# Altium PCB BeagleBoneBlack_cape_template.PcbDoc
Units mil, origin at the board's own origin, x right, y up, seen from the top; angles counter-clockwise.
Board outline 6000 x 4000 mil, 2 copper layers (Top Layer, Bottom Layer); 2 components, 0 nets, 92 pads, 0 vias.
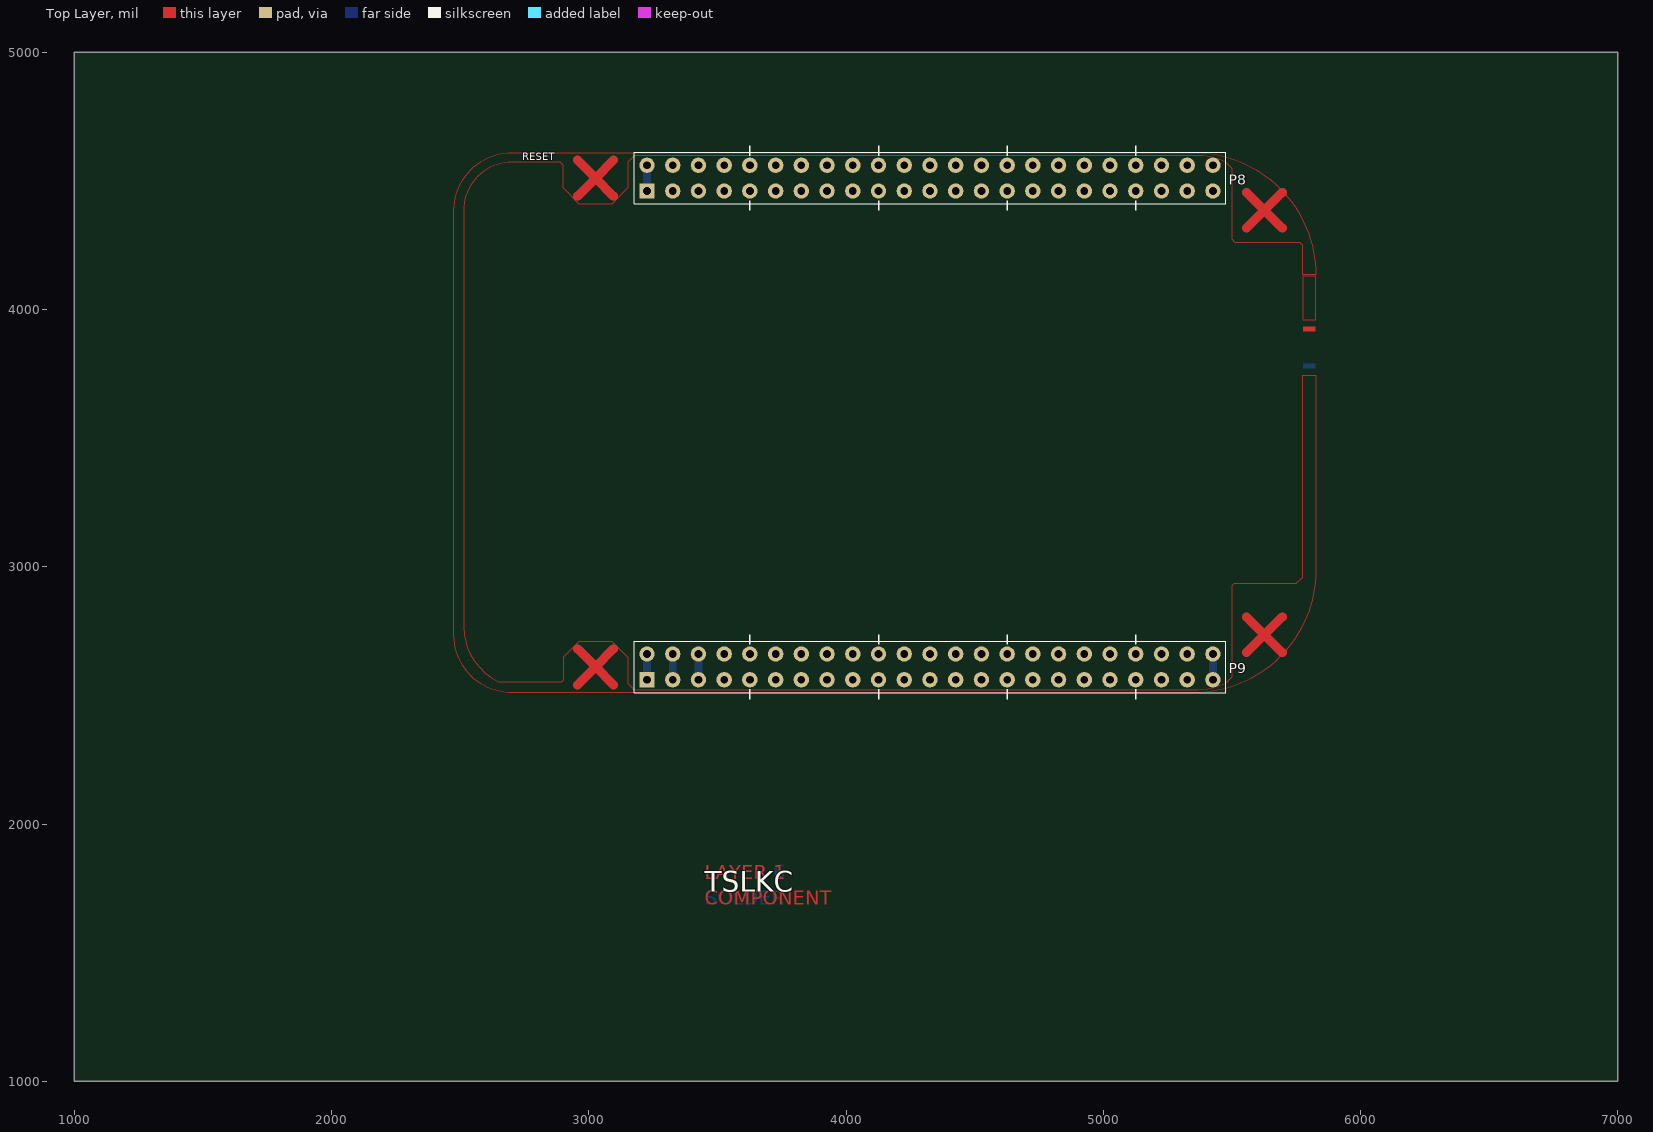
[diagram p0: Top Layer view]
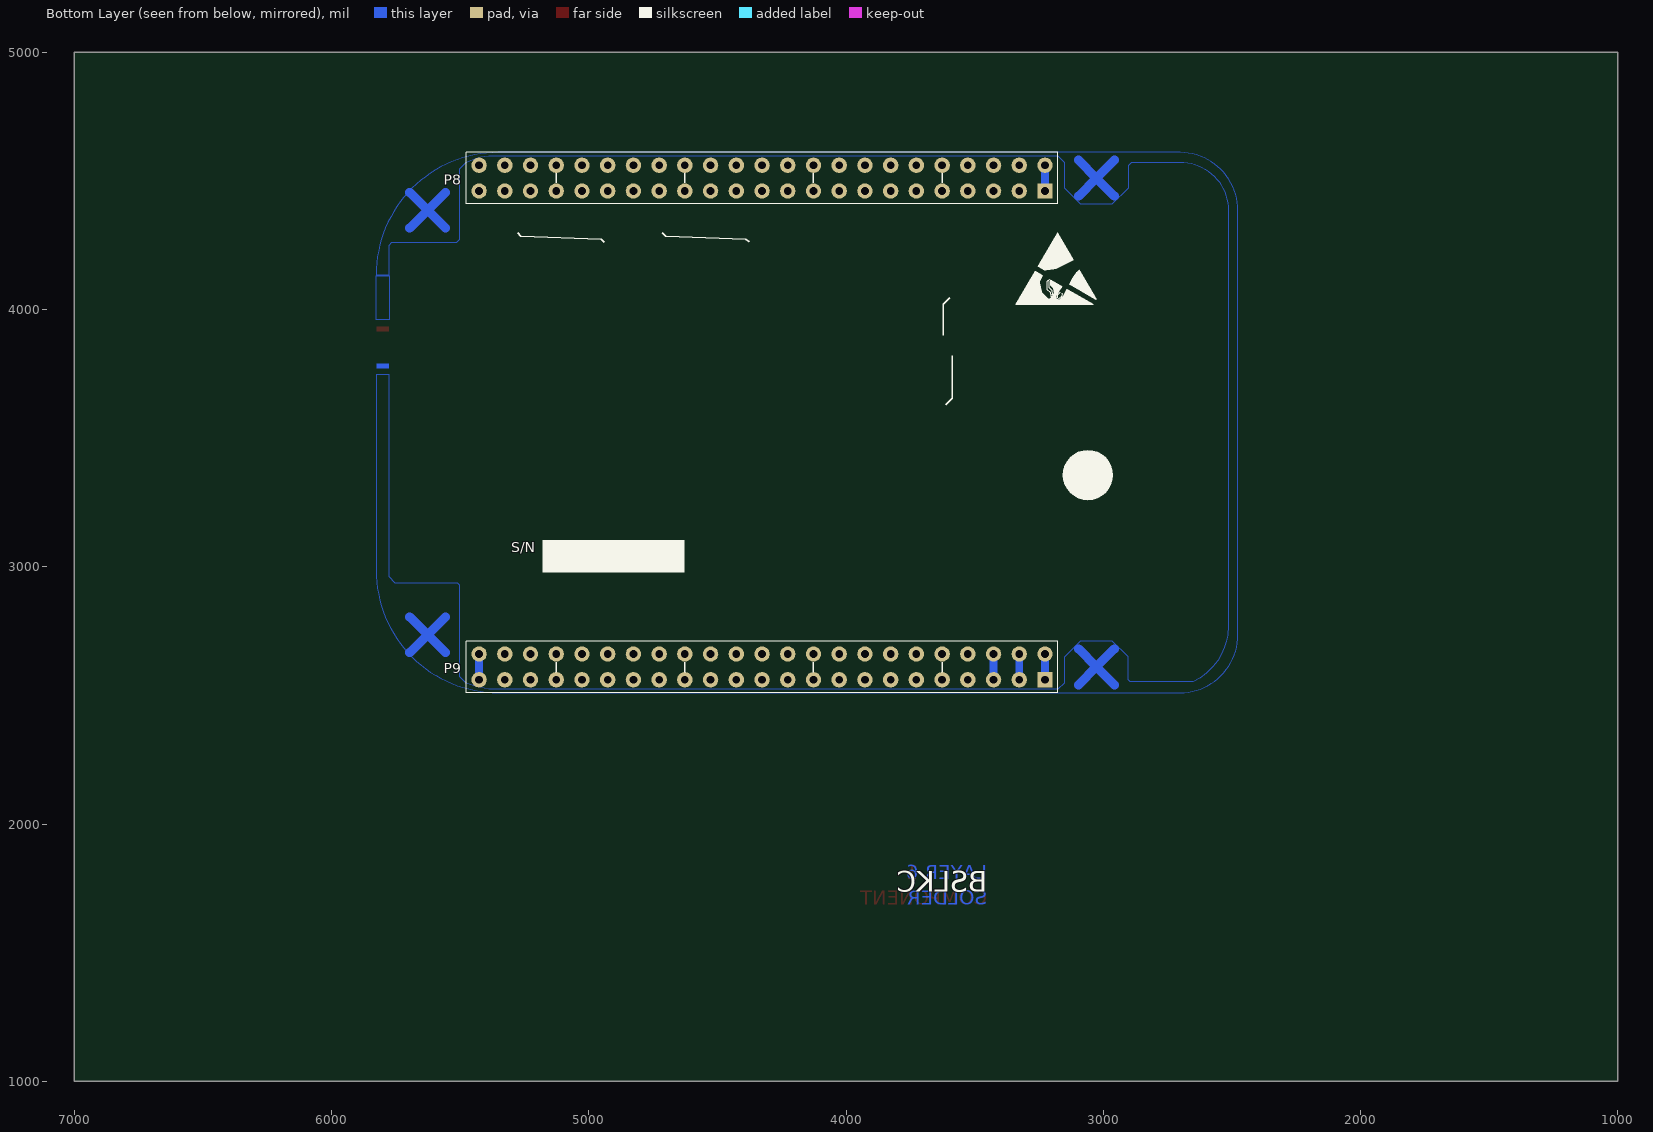
[diagram p1: Bottom Layer view, seen from below]

## Layer stack, top to bottom
Top Layer: signal copper 1.4
Dielectric: dielectric 12.6, FR-4, Dk 4.8
Bottom Layer: signal copper 1.4

## Board outline
1000,1000 7000,1000 7000,5000 1000,5000

## Design rules (kind name [scope] priority, off if disabled: settings)
Clearance [All] p1: gap=10
PolygonConnect [All] p1: connectstyle=Relief reliefconductorwidth=10 reliefentries=4 polygonreliefangle="90 Angle"
RoutingVias [All] p1: holewidth=28 width=50 viastyle="Through Hole" minholewidth=28 minwidth=50 maxholewidth=28 maxwidth=50
SilkscreenOverComponentPads [All] p1: minsilkscreentomaskgap=10
SolderMaskExpansion [All] p1: expansion=4
Width [All] p1: maxlimit=10 minlimit=10 preferedwidth=10
27 further rules are at their usual default settings.

## Components (designator, comment, footprint, x,y, rotation, side; value= is the part's Value field where it differs from the comment)
P8 "FEMALE HEADER 2x23" HEADER23X2 4326.4,4510.8 r0 top locked
P9 "FEMALE HEADER 2x23" HEADER23X2 4326.4,2610.8 r0 top locked

## Footprints (in the part's own frame and the unit in brackets; to place one, negate y for a bottom-side part, rotate by r counter-clockwise, add the part's x,y. Pads: shape width x height; smd on the part's side, far side on the other; paste and mask are expansions set on the pad)
HEADER23X2 [mil] "HEADER23X2"
  rect 60x60 hole 30 mask+2: 1(-1100,-50)
  round 60 hole 30 mask+2: 2(-1100,50) 3(-1000,-50) 4(-1000,50) 5(-900,-50) 6(-900,50) 7(-800,-50) 8(-800,50) 9(-700,-50) 10(-700,50) 11(-600,-50) 12(-600,50) 13(-500,-50) 14(-500,50) 15(-400,-50) 16(-400,50) 17(-300,-50) 18(-300,50) 19(-200,-50) 20(-200,50) 21(-100,-50) 22(-100,50) 23(0,-50) 24(0,50) 25(100,-50) 26(100,50) 27(200,-50) 28(200,50) 29(300,-50) 30(300,50) 31(400,-50) 32(400,50) 33(500,-50) 34(500,50) 35(600,-50) 36(600,50) 37(700,-50) 38(700,50) 39(800,-50) 40(800,50) 41(900,-50) 42(900,50) 43(1000,-50) 44(1000,50) 45(1100,-50) 46(1100,50)
  silkscreen extent -1150,-100 1150,100

## Part data
P8 P9: library part HDR_46_F_2_0.1_0.1, "CONN HEADER FMAL 46PS.1\" DL GOLD"

## Nets (pads, with @x,y where several pads share a name; then routed paths per layer and width w, separated by ;. In a path a pad name is that pad's centre, name@x,y a point inside that pad or via, vN(x,y) a via of type N, cw(c..) or ccw(c..) an arc to the next point about the centre after c; other vN are vias at no path point)
pads on no net: P8.1 P8.2 P8.3 P8.4 P8.5 P8.6 P8.7 P8.8 P8.9 P8.10 P8.11 P8.12 P8.13 P8.14 P8.15 P8.16 P8.17 P8.18 P8.19 P8.20 P8.21 P8.22 P8.23 P8.24 P8.25 P8.26 P8.27 P8.28 P8.29 P8.30 P8.31 P8.32 P8.33 P8.34 P8.35 P8.36 P8.37 P8.38 P8.39 P8.40 P8.41 P8.42 P8.43 P8.44 P8.45 P8.46 P9.1 P9.2 P9.3 P9.4 P9.5 P9.6 P9.7 P9.8 P9.9 P9.10 P9.11 P9.12 P9.13 P9.14 P9.15 P9.16 P9.17 P9.18 P9.19 P9.20 P9.21 P9.22 P9.23 P9.24 P9.25 P9.26 P9.27 P9.28 P9.29 P9.30 P9.31 P9.32 P9.33 P9.34 P9.35 P9.36 P9.37 P9.38 P9.39 P9.40 P9.41 P9.42 P9.43 P9.44 P9.45 P9.46
copper on no net: | length 3647
  Top Layer w35: 2956.86,2541.26 3026.4,2610.8 ; 2956.86,2680.34 3026.4,2610.8 ; 2956.86,4441.26 3026.4,4510.8 ; 2956.86,4580.34 3026.4,4510.8 ; 3095.94,2541.26 3026.4,2610.8 ; 3095.94,2680.34 3026.4,2610.8 ; 3095.94,4441.26 3026.4,4510.8 ; 3095.94,4580.34 3026.4,4510.8 ; 5556.86,2666.26 5626.4,2735.8 ; 5556.86,2805.34 5626.4,2735.8 ; 5556.86,4316.26 5626.4,4385.8 ; 5556.86,4455.34 5626.4,4385.8 ; 5695.94,2666.26 5626.4,2735.8 ; 5695.94,2805.34 5626.4,2735.8 ; 5695.94,4316.26 5626.4,4385.8 ; 5695.94,4455.34 5626.4,4385.8
  Bottom Layer w30: 3226.4,2560.8 3226.4,2660.8 ; 3226.4,4460.8 3226.4,4560.8 ; 3326.4,2560.8 3326.4,2660.8 ; 3426.4,2560.8 3426.4,2660.8 ; 5426.4,2560.8 5426.4,2660.8
  Bottom Layer w35: 2956.86,2541.26 3026.4,2610.8 ; 2956.86,2680.34 3026.4,2610.8 ; 2956.86,4441.26 3026.4,4510.8 ; 2956.86,4580.34 3026.4,4510.8 ; 3095.94,2541.26 3026.4,2610.8 ; 3095.94,2680.34 3026.4,2610.8 ; 3095.94,4441.26 3026.4,4510.8 ; 3095.94,4580.34 3026.4,4510.8 ; 5556.86,2666.26 5626.4,2735.8 ; 5556.86,2805.34 5626.4,2735.8 ; 5556.86,4316.26 5626.4,4385.8 ; 5556.86,4455.34 5626.4,4385.8 ; 5695.94,2666.26 5626.4,2735.8 ; 5695.94,2805.34 5626.4,2735.8 ; 5695.94,4316.26 5626.4,4385.8 ; 5695.94,4455.34 5626.4,4385.8

## Polygon pours and split planes (outlines as drawn)
no net on Bottom Overlay "Bottom Overlay-No Net" (solid): 2999.23,3321.11 2998.58,3321.78 2996.64,3324.17 2994.97,3326.81 2993.61,3329.7 2992.55,3332.84 2991.77,3336.24 2991.33,3339.88 2991.19,3343.74 2991.21,3345.46 2991.46,3349.31 2992.05,3352.86 2992.89,3356.17 2994.03,3359.23 2995.47,3362.04 2997.19,3364.6 2999.23,3366.88 3000.25,3367.85 3002.9,3369.85 3005.76,3371.41 3008.87,3372.52 3012.21,3373.18 3015.82,3373.41 3017.69,3373.35 3020.91,3372.8 3023.94,3371.71 3026.8,3370.13 3029.45,3368.02 3031.89,3365.37 3031.89,3401.58 3041.96,3401.58 3041.96,3315.58 3031.89,3315.58 3031.89,3322.64 3030.89,3321.06 3028.81,3318.72 3026.3,3316.91 3023.41,3315.61 3020.07,3314.83 3016.32,3314.58 3014.24,3314.66 3010.71,3315.11 3007.45,3315.97 3004.45,3317.25 3001.7,3318.97 2999.23,3321.11
no net on Bottom Overlay "Bottom Overlay-No Net" (solid): 3058.86,3358.42 3057.31,3361.09 3056.08,3364.07 3055.21,3367.37 3054.69,3370.99 3054.52,3374.94 3054.52,3376.19 3054.83,3379.95 3055.47,3383.42 3056.47,3386.62 3057.8,3389.54 3059.5,3392.18 3061.56,3394.54 3063.78,3396.52 3066.5,3398.35 3069.42,3399.76 3072.62,3400.76 3076.01,3401.38 3079.66,3401.58 3119.86,3401.58 3119.86,3315.58 3108.29,3315.58 3108.29,3349.28 3079.66,3349.28 3075.82,3349.47 3072.26,3350 3068.98,3350.92 3066.04,3352.17 3063.39,3353.81 3061.06,3355.81 3060.78,3356.09 3058.86,3358.42
no net on Bottom Overlay "Bottom Overlay-No Net" (solid): 3156.31,3356.55 ccw(c3059.67,3356.55) 3059.67,3453.19 ccw(c3059.67,3356.55) 2963.03,3356.55 ccw(c3059.67,3356.55) 3059.67,3259.91 ccw(c3059.67,3356.55) 3156.31,3356.55
no net on Bottom Overlay "Bottom Overlay-No Net" (solid): 4628.9,2978.3 5178.9,2978.3 5178.9,3103.3 4628.9,3103.3 4628.9,2978.3
no net on Mechanical 4 "TITLE_BLOCK-No Net" (solid): 6001.4,2435.8 5901.4,2435.8 5901.4,2335.8 5851.4,2335.8 5851.4,2485.8 6001.4,2485.8 6001.4,2435.8
no net on Mechanical 4 "TITLE_BLOCK-No Net" (solid): 5901.4,4785.8 5901.4,4685.8 6001.4,4685.8 6001.4,4635.8 5851.4,4635.8 5851.4,4785.8 5901.4,4785.8
no net on Mechanical 4 "TITLE_BLOCK-No Net" (solid): 2301.4,4685.8 2401.4,4685.8 2401.4,4785.8 2451.4,4785.8 2451.4,4635.8 2301.4,4635.8 2301.4,4685.8
no net on Mechanical 4 "TITLE_BLOCK-No Net" (solid): 2401.4,2335.8 2401.4,2435.8 2301.4,2435.8 2301.4,2485.8 2451.4,2485.8 2451.4,2335.8 2401.4,2335.8
no net on Top Layer "TOP-GND_EARTH" (solid, remove dead copper, pour order 23): 5776,4130.1 5776,3959.5 5826,3959.5 5826,4130.1
no net on Top Layer "TOP-GND_EARTH" (solid, remove dead copper, pour order 24): 5776,2960.1 5776,3744.9 5826,3744.9 5826,2985.1 cw(c5351,2985.1) 5351,2510.1 2701,2510.1 cw(c2701,2735.1) 2476,2735.1 2476,4385.1 cw(c2701,4385.1) 2701,4610.1 5351,4610.1 cw(c5351,4135.1) 5826,4135.1 5776,4135.1 5776,4250.1 5766,4260.1 5513.5,4260.1 5501,4272.6 5501,4547.6 5476,4572.6 5475.87,4572.33 ccw(c5372.31,4372.83) 5373.83,4597.6 3176,4597.6 3151,4572.6 3151,4472.6 3088.5,4410.1 2963.5,4410.1 2901,4472.6 2901,4560.1 2888.5,4572.6 2701,4572.6 ccw(c2701,4385.1) 2513.5,4385.1 2513.5,2771.1 2516.1,2732.9 2521,2710.2 2528.4,2685.8 2540.1,2659.7 2554.7,2635.1 2573.5,2611.1 2598.3,2586.1 2624.7,2566.4 2649.9,2552.8 2649.84,2553.1 2649.7,2553.1 2649.8,2553.3 2649.84,2553.1 2894.7,2553.1 2902.8,2561.1 2902.8,2650.6 2963.5,2710.1 3088.5,2710.1 3151,2647.6 3151,2547.6 3176,2522.6 5351.01,2522.6 ccw(c5356.11,2827.67) 5476,2547.1 5501,2572.1 5501,2926.8 5509.3,2935.1 5751,2935.1
no net on Bottom Layer "TOP-GND_EARTH" (solid, remove dead copper, pour order 21): 5776.5,4130.6 5776.5,3959.5 5826.5,3959.5 5826.5,4130.6
no net on Bottom Layer "TOP-GND_EARTH" (solid, remove dead copper, pour order 22): 5776.5,2960.6 5776.5,3745.6 5826.5,3745.6 5826.5,2985.6 cw(c5351.5,2985.6) 5351.5,2510.6 2701.5,2510.6 cw(c2701.5,2735.6) 2476.5,2735.6 2476.5,4385.6 cw(c2701.5,4385.6) 2701.5,4610.6 5351.5,4610.6 cw(c5351.5,4135.6) 5826.5,4135.6 5776.5,4135.6 5776.5,4250.6 5766.5,4260.6 5514,4260.6 5501.5,4273.1 5501.5,4548.1 5476.5,4573.1 5476.37,4572.83 ccw(c5372.81,4373.33) 5374.33,4598.1 3176.5,4598.1 3151.5,4573.1 3151.5,4473.1 3089,4410.6 2964,4410.6 2901.5,4473.1 2901.5,4560.6 2889,4573.1 2701.5,4573.1 ccw(c2701.5,4385.6) 2514,4385.6 2514,2771.6 2516.6,2733.4 2521.5,2710.7 2528.9,2686.3 2540.6,2660.2 2555.2,2635.6 2574,2611.6 2598.8,2586.6 2625.2,2566.9 2650.4,2553.3 2650.34,2553.6 2650.2,2553.6 2650.3,2553.8 2650.34,2553.6 2895.2,2553.6 2903.3,2561.6 2903.3,2651.1 2964,2710.6 3089,2710.6 3151.5,2648.1 3151.5,2548.1 3176.5,2523.1 5351.51,2523.1 ccw(c5356.61,2828.17) 5476.5,2547.6 5501.5,2572.6 5501.5,2927.3 5509.8,2935.6 5751.5,2935.6

## Other copper
Top Layer:
  rectangle: 5775.8,3914.4 5825.8,3934.4
  text "LAYER 1" at 3451.4,1785.8 h55
  text "COMPONENT" at 3451.4,1685.8 h55
Bottom Layer:
  rectangle: 5775.8,3769.9 5825.8,3789.9
  text "LAYER 6" at 3451.4,1785.8 h55
  text "SOLDER" at 3451.4,1685.8 h55

## Silkscreen, mask and mechanical layers (free items; w line width, h text height)
Top Overlay:
  lines w5: 3626.4,2485.8 3626.4,2523.3 ; 3626.4,2698.3 3626.4,2735.8 ; 3626.4,4385.8 3626.4,4423.3 ; 3626.4,4598.3 3626.4,4635.8 ; 4126.4,2485.8 4126.4,2523.3 ; 4126.4,2698.3 4126.4,2735.8 ; 4126.4,4385.8 4126.4,4423.3 ; 4126.4,4598.3 4126.4,4635.8 ; 4626.4,2485.8 4626.4,2523.3 ; 4626.4,2698.3 4626.4,2735.8 ; 4626.4,4385.8 4626.4,4423.3 ; 4626.4,4598.3 4626.4,4635.8 ; 5126.4,2485.8 5126.4,2523.3 ; 5126.4,2698.3 5126.4,2735.8 ; 5126.4,4385.8 5126.4,4423.3 ; 5126.4,4598.3 5126.4,4635.8
  text "RESET" at 2741.4,4580.8 h28
  text "TSLK" at 3451.4,1735.8 h80
  text "TSLKC" at 3451.4,1735.8 h80
Bottom Overlay:
  drawing of 2121 lines, arcs and shapes, not listed
  text "S/N" at 5301.4,3055.8 h40
  text "BSLK" at 3451.4,1735.8 h80
  text "BSLKC" at 3451.4,1735.8 h80
Top Solder:
  text "SMC" at 3451.4,1735.8 h80
Bottom Solder:
  text "SMS" at 3451.4,1735.8 h80
Mechanical 1:
  circle w1: c1751.4,6605.8 r64
  circle w1: c1751.4,7235.8 r30
  circle w1: c1751.4,8075.8 r9.85
  lines w1: 1396.4,5660.8 6746.4,5660.8 ; 1396.4,5870.8 6746.4,5870.8 ; 1396.4,6080.8 6746.4,6080.8 ; 1396.4,6290.8 6746.4,6290.8 ; 1396.4,6500.8 6746.4,6500.8 ; 1396.4,6710.8 6746.4,6710.8 ; 1396.4,6920.8 6746.4,6920.8 ; 1396.4,7130.8 6746.4,7130.8 ; 1396.4,7340.8 6746.4,7340.8 ; 1396.4,7550.8 6746.4,7550.8 ; 1396.4,7760.8 6746.4,7760.8 ; 1396.4,7970.8 6746.4,7970.8 ; 1396.4,8180.8 6746.4,8180.8 ; 1396.4,8315.8 6746.4,8315.8 ; 1396.4,8450.8 6746.4,8450.8 ; 1736.4,7865.8 1766.4,7865.8 ; 1751.4,7850.8 1751.4,7880.8 ; 2106.4,5450.8 2106.4,8315.8 ; 3616.4,5450.8 3616.4,8315.8 ; 3951.4,3935.8 4551.4,3935.8 ; 5126.4,5450.8 5126.4,8315.8 ; 6136.4,5450.8 6136.4,8315.8 ; 1396.4,5450.8 6746.4,5450.8 6746.4,8700.8 1396.4,8700.8 1396.4,5450.8 ; 1688.9,6815.8 1751.4,6753.3 1813.9,6815.8 1751.4,6878.3 1688.9,6815.8 ; 1701.4,5515.8 ccw(c1701.4,5555.8) 1701.4,5595.8 1801.4,5595.8 ccw(c1801.4,5555.8) 1801.4,5515.8 1701.4,5515.8 ; 1711.4,5725.8 ccw(c1711.4,5765.8) 1711.4,5805.8 1791.4,5805.8 ccw(c1791.4,5765.8) 1791.4,5725.8 1711.4,5725.8 ; 1711.4,5935.8 ccw(c1711.4,5975.8) 1711.4,6015.8 1791.4,6015.8 ccw(c1791.4,5975.8) 1791.4,5935.8 1711.4,5935.8 ; 1719.9,6994.3 1719.9,7057.3 1782.9,7057.3 1782.9,6994.3 1719.9,6994.3 ; 1723.9,6145.8 ccw(c1723.9,6185.8) 1723.9,6225.8 1778.9,6225.8 ccw(c1778.9,6185.8) 1778.9,6145.8 1723.9,6145.8 ; 1726.4,7420.8 1726.4,7470.8 1776.4,7470.8 1776.4,7420.8 1726.4,7420.8 ; 1733.9,6380.8 ccw(c1733.9,6395.8) 1733.9,6410.8 1768.9,6410.8 ccw(c1768.9,6395.8) 1768.9,6380.8 1733.9,6380.8
  text "DRILL CHART: TOP to BOTTOM" at 2771.4,8513.3 h125
  text "ALL UNITS ARE IN MILS" at 3246.4,8333.3 h100
  text "FIGURE" at 1526.4,8198.3 h100
  text "SIZE" at 2716.4,8198.3 h100
  text "TOLERANCE" at 4026.4,8198.3 h100
  text "PLATED" at 5406.4,8198.3 h100
  text "QTY" at 6336.4,8198.3 h100
  text "6.0" at 2711.4,8013.3 h125
  text "+3.0/-3.0" at 3921.4,8013.3 h125
  text "PLATED" at 5331.4,8013.3 h125
  text "27" at 6341.4,8013.3 h125
  text "8.0" at 2711.4,7803.3 h125
  text "+3.0/-3.0" at 3921.4,7803.3 h125
  text "PLATED" at 5331.4,7803.3 h125
  text "794" at 6291.4,7803.3 h125
  text "12.0" at 2661.4,7593.3 h125
  text "+3.0/-3.0" at 3921.4,7593.3 h125
  text "PLATED" at 5331.4,7593.3 h125
  text "30" at 6341.4,7593.3 h125
  text "30.0" at 2661.4,7383.3 h125
  text "+3.0/-3.0" at 3921.4,7383.3 h125
  text "PLATED" at 5331.4,7383.3 h125
  text "96" at 6341.4,7383.3 h125
  text "40.0" at 2661.4,7173.3 h125
  text "+3.0/-3.0" at 3921.4,7173.3 h125
  text "PLATED" at 5331.4,7173.3 h125
  text "26" at 6341.4,7173.3 h125
  text "63.0" at 2661.4,6963.3 h125
  text "+3.0/-3.0" at 3921.4,6963.3 h125
  text "PLATED" at 5331.4,6963.3 h125
  text "2" at 6391.4,6963.3 h125
  text "125.0" at 2611.4,6753.3 h125
  text "+3.0/-3.0" at 3921.4,6753.3 h125
  text "PLATED" at 5331.4,6753.3 h125
  text "4" at 6391.4,6753.3 h125
  text "128.0" at 2611.4,6543.3 h125
  text "+5.0/-5.0" at 3921.4,6543.3 h125
  text "NON-PLATED" at 5131.4,6543.3 h125
  text "2" at 6391.4,6543.3 h125
  text "50.0x15.0" at 2411.4,6333.3 h125
  text "+3.0/-3.0" at 3921.4,6333.3 h125
  text "PLATED" at 5331.4,6333.3 h125
  text "2" at 6391.4,6333.3 h125
  text "95.0x40.0" at 2411.4,6123.3 h125
  text "+3.0/-3.0" at 3921.4,6123.3 h125
  text "PLATED" at 5331.4,6123.3 h125
  text "2" at 6391.4,6123.3 h125
  text "120.0x40.0" at 2361.4,5913.3 h125
  text "+3.0/-3.0" at 3921.4,5913.3 h125
  text "PLATED" at 5331.4,5913.3 h125
  text "1" at 6391.4,5913.3 h125
  text "120.0x40.0" at 2361.4,5703.3 h125
  text "+3.0/-3.0" at 3921.4,5703.3 h125
  text "PLATED" at 5331.4,5703.3 h125
  text "1" at 6391.4,5703.3 h125
  text "140.0x40.0" at 2361.4,5493.3 h125
  text "+3.0/-3.0" at 3921.4,5493.3 h125
  text "PLATED" at 5331.4,5493.3 h125
  text "1" at 6391.4,5493.3 h125
Mechanical 3:
  lines w1: 2426.4,2485.8 2476.4,2485.8 ; 2451.4,2460.8 2451.4,2510.8 ; 2451.4,2735.8 ccw(c2701.4,2735.8) 2701.4,2485.8 5351.4,2485.8 ccw(c5351.4,2985.8) 5851.4,2985.8 5851.4,4135.8 ccw(c5351.4,4135.8) 5351.4,4635.8 2701.4,4635.8 ccw(c2701.4,4385.8) 2451.4,4385.8 2451.4,2735.8
Mechanical 8:
  lines w1: 1126.4,2635.8 1151.4,2485.8 ; 1126.4,2635.8 1176.4,2635.8 ; 1126.4,2635.8 1151.4,2485.8 ; 1126.4,2635.8 1176.4,2635.8 ; 1126.4,4485.8 1151.4,4635.8 ; 1126.4,4485.8 1176.4,4485.8 ; 1126.4,4485.8 1151.4,4635.8 ; 1126.4,4485.8 1176.4,4485.8 ; 1151.4,2485.8 1176.4,2635.8 ; 1151.4,2485.8 1151.4,3236.8 1151.4,2485.8 ; 1151.4,2485.8 1176.4,2635.8 ; 1151.4,4635.8 1176.4,4485.8 ; 1151.4,4635.8 1151.4,3934.8 1151.4,4635.8 ; 1151.4,4635.8 1176.4,4485.8 ; 2189.68,4922.3 2526.4,4585.8 ; 2189.68,4922.3 2039.68,4922.3 2189.68,4922.3 ; 2189.68,4922.3 2526.4,4585.8 ; 2402.63,4674.15 2526.4,4585.8 ; 2402.63,4674.15 2437.97,4709.51 ; 2402.63,4674.15 2526.4,4585.8 ; 2402.63,4674.15 2437.97,4709.51 ; 2437.97,4709.51 2526.4,4585.8 ; 2437.97,4709.51 2526.4,4585.8 ; 2451.4,1135.8 2601.4,1160.8 ; 2451.4,1135.8 2601.4,1110.8 ; 2451.4,1135.8 3752.4,1135.8 2451.4,1135.8 ; 2451.4,1135.8 2601.4,1160.8 ; 2451.4,1135.8 2601.4,1110.8 ; 2601.4,1110.8 2601.4,1160.8 ; 2601.4,1110.8 2601.4,1160.8 ; 5501.4,2085.8 5626.4,2335.8 ; 5501.4,2085.8 5501.4,2034.8 5501.4,2085.8 ; 5501.4,2085.8 5626.4,2335.8 ; 5626.4,2335.8 5626.4,2635.8 5626.4,2335.8 ; 5676.4,4535.8 6013.12,4872.3 ; 5676.4,4535.8 5764.83,4659.51 ; 5676.4,4535.8 5800.17,4624.15 ; 5676.4,4535.8 6013.12,4872.3 ; 5676.4,4535.8 5764.83,4659.51 ; 5676.4,4535.8 5800.17,4624.15 ; 5701.4,1110.8 5851.4,1135.8 ; 5701.4,1110.8 5701.4,1160.8 ; 5701.4,1110.8 5851.4,1135.8 ; 5701.4,1110.8 5701.4,1160.8 ; 5701.4,1160.8 5851.4,1135.8 ; 5701.4,1160.8 5851.4,1135.8 ; 5764.83,4659.51 5800.17,4624.15 ; 5764.83,4659.51 5800.17,4624.15 ; 5851.4,1135.8 4450.4,1135.8 5851.4,1135.8 ; 6013.12,4872.3 6163.12,4872.3 6013.12,4872.3 ; 1051.4,2485.8 1751.4,2485.8 1051.4,2485.8 ; 1051.4,4635.8 1351.4,4635.8 1051.4,4635.8 ; 1980.4,2485.8 2351.4,2485.8 1980.4,2485.8 ; 1995.4,2610.8 2926.4,2610.8 1995.4,2610.8 ; 2000.4,4510.8 2926.4,4510.8 2000.4,4510.8 ; 2000.4,4635.8 2601.4,4635.8 2000.4,4635.8 ; 2451.4,1035.8 2451.4,1785.8 2451.4,1035.8 ; 2451.4,2014.8 2451.4,2385.8 2451.4,2014.8 ; 3026.4,2029.8 3026.4,2510.8 3026.4,2029.8 ; 5726.4,2735.8 6357.4,2735.8 5726.4,2735.8 ; 5726.4,4385.8 6402.4,4385.8 5726.4,4385.8 ; 5851.4,1035.8 5851.4,1385.8 5851.4,1035.8 ; 5851.4,2034.8 5851.4,2885.8 5851.4,2034.8
  text "R.250 2X" at 1101.4,4860.8 h100
  text "R.500 2X" at 6213.12,4822.3 h100
  text "R.500 2X" at 6213.12,4822.3 h100
  text "2.150" at 1381.4,4585.8 h100
  text "2.150" at 1381.4,4585.8 h100
  text "2.025" at 1381.4,4460.8 h100
  text "2.025" at 1381.4,4460.8 h100
  text "1.900" at 6481.4,4335.8 h100
  text "1.900" at 6481.4,4335.8 h100
  text "2.150" at 1201.4,3315.8 h100 r90
  text "2.150" at 1201.4,3315.8 h100 r90
  text ".250" at 6436.4,2685.8 h100
  text ".250" at 6436.4,2685.8 h100
  text ".125" at 1486.4,2560.8 h100
  text ".125" at 1486.4,2560.8 h100
  text "0" at 1801.4,2435.8 h100
  text "0" at 1801.4,2435.8 h100
  text "0" at 2401.4,1835.8 h100
  text "0" at 2401.4,1835.8 h100
  text ".575" at 3076.4,1520.8 h100 r90
  text ".575" at 3076.4,1520.8 h100 r90
  text "3.175" at 5551.4,1415.8 h100 r90
  text "3.175" at 5551.4,1415.8 h100 r90
  text "3.400" at 5901.4,1415.8 h100 r90
  text "3.400" at 5901.4,1415.8 h100 r90
  text "3.400" at 3831.4,1085.8 h100
  text "3.400" at 3831.4,1085.8 h100